# Altium PCB 项目-6层核心板.PcbDoc (part 3 of 3)
Units mil, origin at the board's own origin, x right, y up, seen from the top; angles counter-clockwise.
Board outline 2165.35 x 1574.8 mil, 6 copper layers (TOP, GND02, ART03, ART04, PWR05, BOTTOM); 172 components, 0 nets, 834 pads, 541 vias.
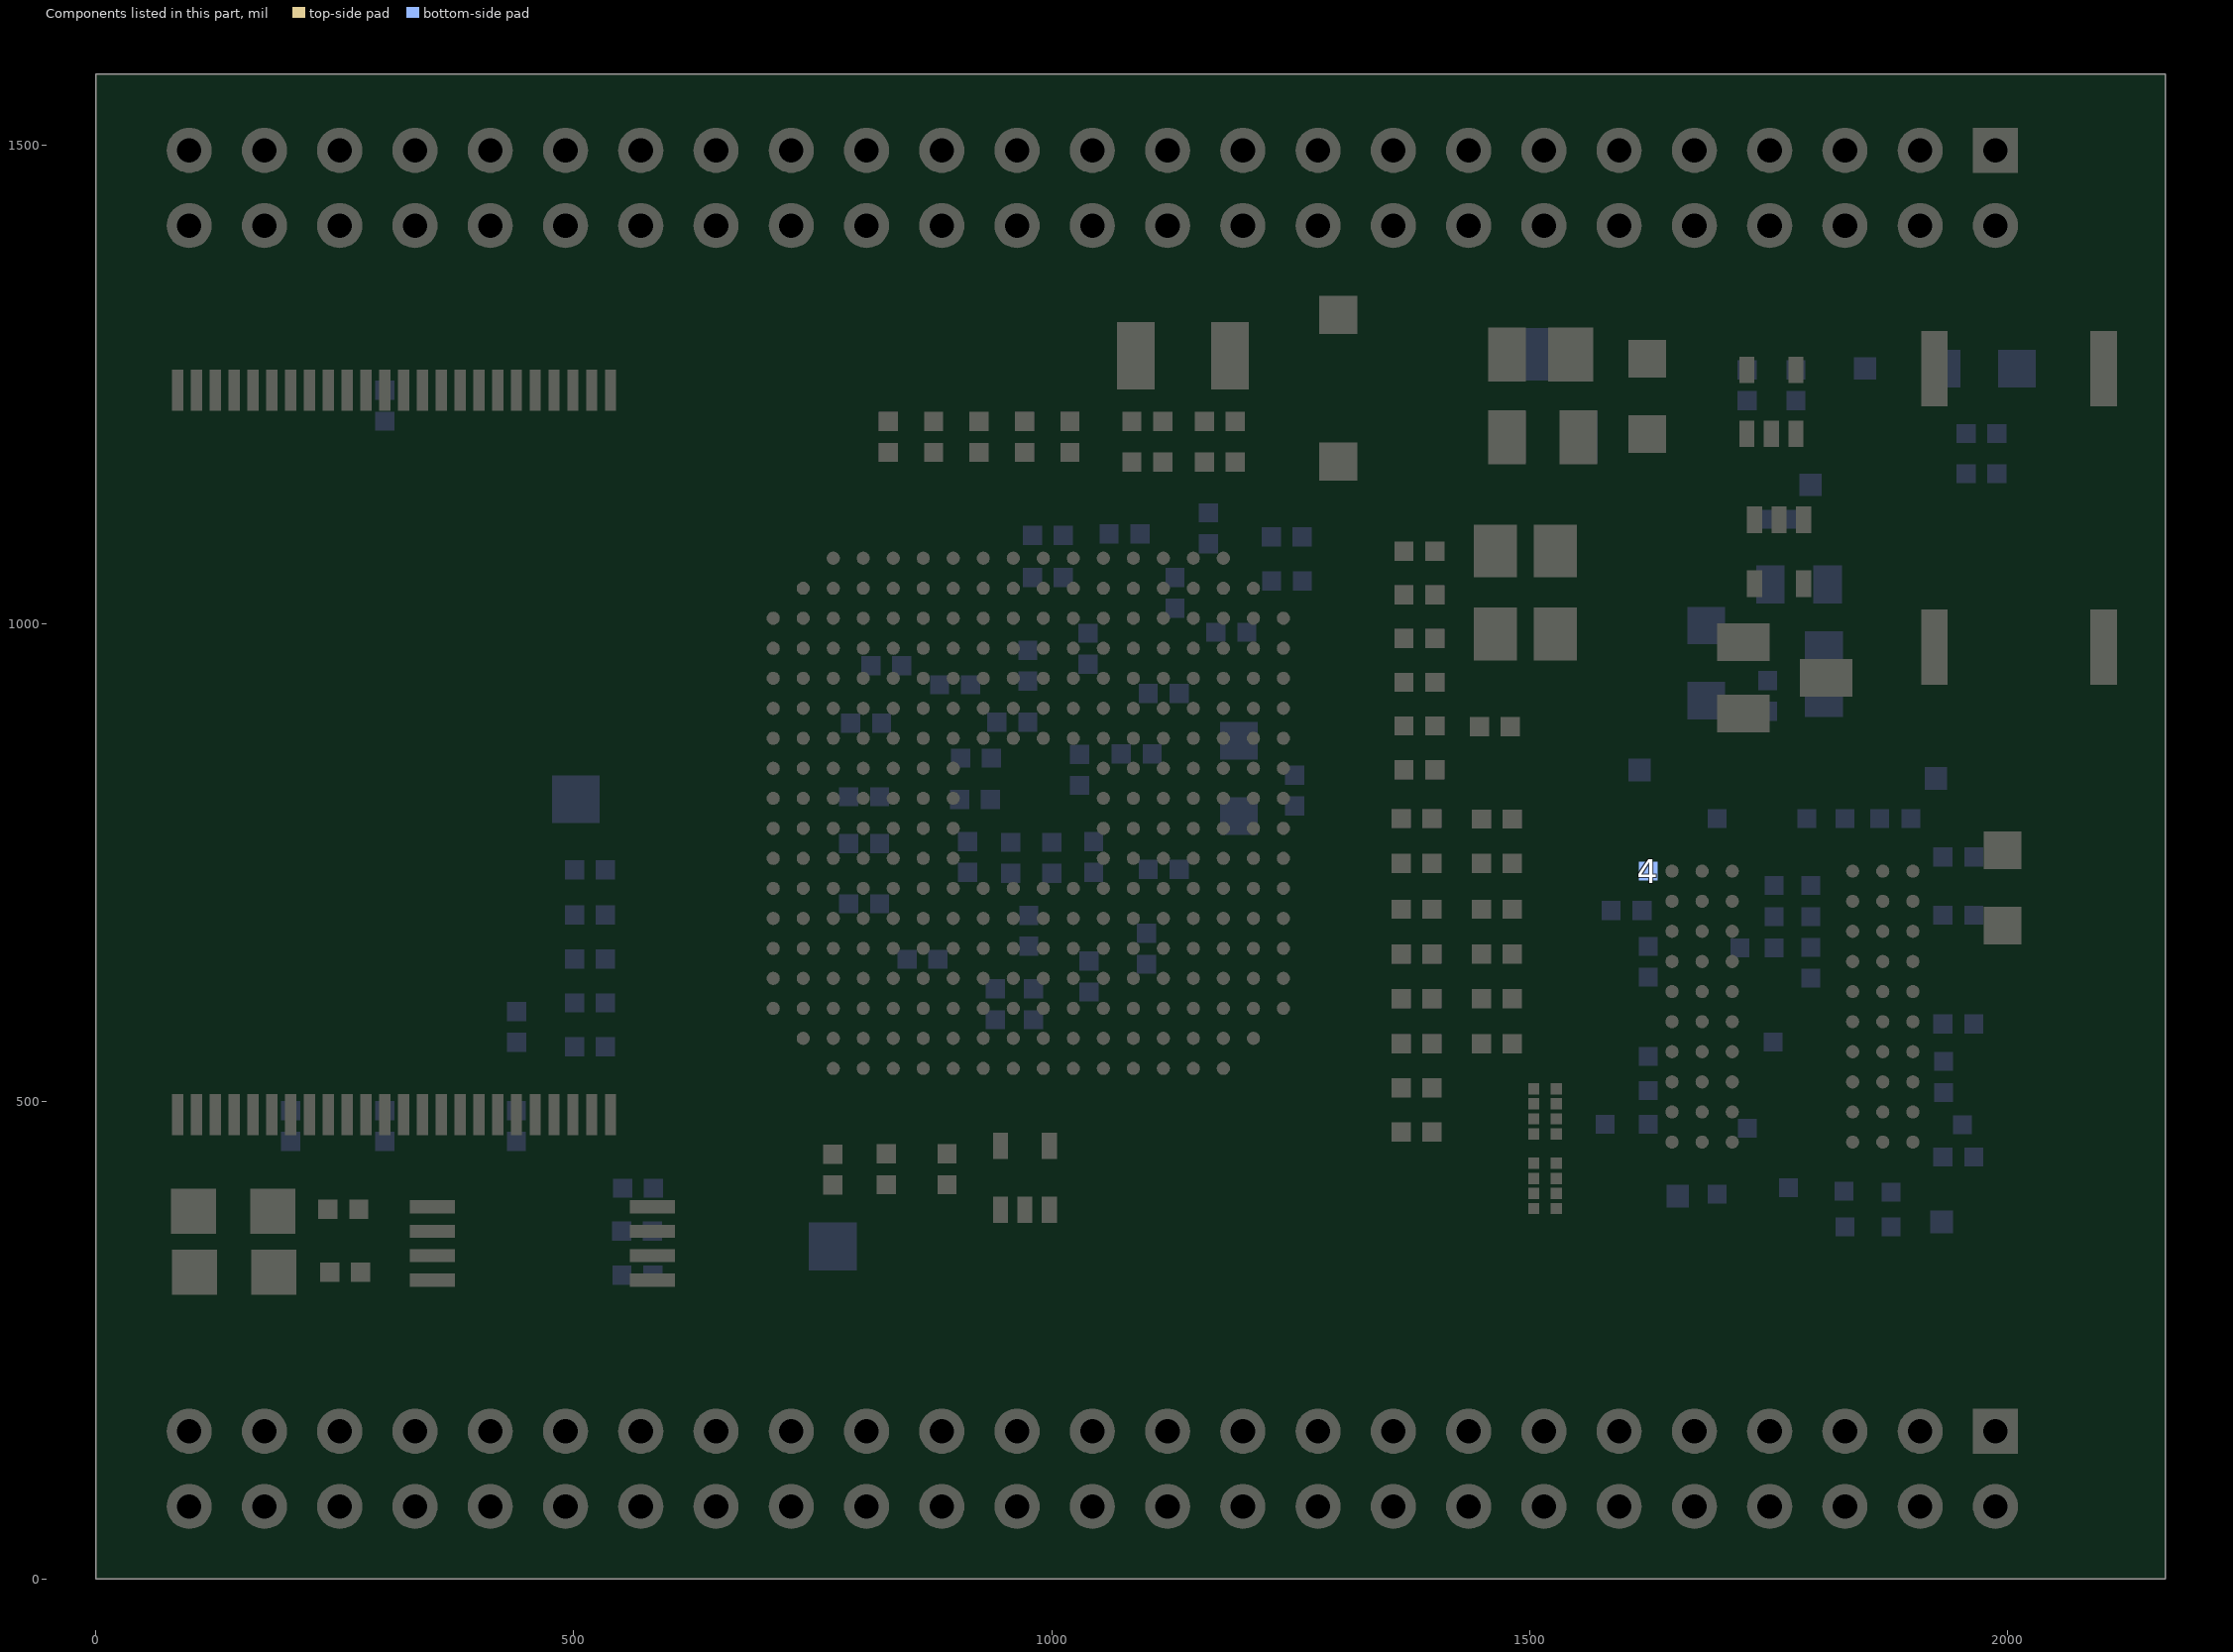
[diagram p7: the components of this part, seen from the top]

## Via types
v1: diameter 16, hole 8, TOP to BOTTOM, tented both sides, 541 vias

## Nets (pads, with @x,y where several pads share a name; then routed paths per layer and width w, separated by ;. In a path a pad name is that pad's centre, name@x,y a point inside that pad or via, vN(x,y) a via of type N, cw(c..) or ccw(c..) an arc to the next point about the centre after c; other vN are vias at no path point) (continued)
copper on no net: (continued)
  ART04 w6.2: 97.6,1416.26 97.01,1415.67 97.01,1367.73 111.01,1353.73 111.01,1164.73 165.01,1110.73 165.01,897.73 206.01,856.73 206.01,633.73 274.01,565.73 v1(385.01,565.73) 450.01,565.73 498.01,517.73 723.33,517.73 v1(724.3,518.7) ; 97.6,1495 141.01,1451.59 141.01,1356.73 ; v1(125.01,1073.73) 125.01,879.73 168.01,836.73 168.01,527.73 223.01,472.73 308.01,472.73 374.01,406.73 400.01,406.73 423.01,383.73 643.01,383.73 655.01,395.73 738.01,395.73 756.01,413.73 834.01,413.73 897,476.72 v1(897,503) ; v1(126.01,1120.73) 146.01,1100.73 146.01,888.73 187.01,847.73 187.01,630.73 270.01,547.73 444.01,547.73 492.01,499.73 739.01,499.73 775.01,535.73 804.13,535.73 v1(818.5,550.1) ; 141.01,1361.73 141.01,1356.73 ; 176.34,1416.26 178.01,1414.59 178.01,1338.73 142.01,1302.73 142.01,1173.73 201.01,1114.73 201.01,918.73 539.01,580.73 662.01,580.73 677.01,565.73 708.53,565.73 v1(724.3,581.5) ; 176.34,1495 215.01,1456.33 215.01,1346.73 162.01,1293.73 162.01,1178.73 177.01,1163.73 220.01,1163.73 241.01,1142.73 241.01,936.73 565.01,612.73 653.01,612.73 673.01,632.73 705.01,632.73 724.84,612.9 v1(787.1,612.9) ; v1(184.1,1204.87) 204.24,1184.73 244.01,1184.73 255.01,1173.73 255.01,1075.73 ; v1(203.69,555.14) 255.1,503.73 364.01,503.73 393.01,474.73 439.01,474.73 457.84,455.9 v1(691.9,455.9) v1@692.9,455.9 ; v1(203.78,525.14) 240.19,488.73 355.01,488.73 385.01,458.73 430.01,458.73 470.01,418.73 565.01,418.73 585.01,438.73 648.01,438.73 657.01,429.73 700.01,429.73 724.3,454.02 v1(724.3,455.9) ; v1@223.01,1118.73 223.01,928.73 554.54,597.2 859.54,597.2 865.6,591.14 865.6,565.8 v1(881.3,550.1) ; v1(223.47,1204.87) 249.87,1204.87 273.01,1181.73 273.01,963.73 560.01,676.73 654.01,676.73 670.74,660 890.74,660 900.01,650.73 908.01,650.73 912.7,646.04 v1(912.7,612.9) ; 255.01,1090.73 255.01,1075.73 ; 255.08,1416.26 257.01,1414.33 257.01,1366.73 ; 255.08,1495 292.01,1458.07 292.01,1387.73 274.01,1369.73 274.01,1261.73 386.86,1148.88 386.86,983.88 573.01,797.73 787.01,797.73 818.5,829.22 v1(818.5,864.1) ; 257.01,1373.73 257.01,1366.73 ; v1(285.01,589.73) 462.01,589.73 513.01,538.73 747.01,538.73 757.01,548.73 785.73,548.73 v1(818.5,581.5) ; v1(315.01,1084.87) 295.01,1064.87 295.01,972.73 576.34,691.4 922.34,691.4 928.4,685.34 928.4,597.2 v1(912.7,581.5) ; v1(316.01,1048.73) 316.01,976.73 569.94,722.8 683.94,722.8 703.01,703.73 802.01,703.73 821.08,722.8 950.94,722.8 959.8,713.94 959.8,597.2 v1(912.7,550.1) ; 333.82,1416.26 333.82,1375.92 357.01,1352.73 357.01,1210.73 404.71,1163.03 404.71,991.03 579.01,816.73 776.01,816.73 787.1,827.82 v1(787.1,864.1) ; 333.82,1495 374.01,1454.81 374.01,1217.73 422.56,1169.18 422.56,1000.18 577.01,845.73 705.93,845.73 v1(724.3,864.1) ; v1(350.32,1124.87) 350.32,988.42 584.54,754.2 935.54,754.2 972.01,717.73 972.01,583.73 928.4,540.12 v1(928.4,503) ; v1(365.01,525.73) 398.01,492.73 451.01,492.73 470.01,473.73 661.01,473.73 788.01,473.73 834.2,519.92 834.2,565.8 v1(849.9,581.5) ; v1(400.63,525.14) 419.04,506.73 461.01,506.73 481.01,486.73 689.01,486.73 755.13,486.73 v1(787.1,518.7) ; v1(411.01,426.73) 439.01,398.73 571.01,398.73 595.01,422.73 641.01,422.73 647.01,416.73 731.01,416.73 742.51,428.23 818.51,428.23 849.9,459.62 v1(849.9,550.1) ; 412.56,1495 458.26,1449.3 458.26,1160.73 ; 414.01,1421.73 414.01,1223.73 440.41,1197.33 440.41,1010.33 586.64,864.1 v1(661.5,864.1) ; 458.26,1288.73 458.26,1160.73 ; 491.3,1416.26 495.01,1412.55 495.01,1004.73 596.01,903.73 747.47,903.73 v1(755.7,895.5) ; 491.3,1495 531.01,1455.29 531.01,1025.99 v1(630.1,926.9) ; 570.04,1416.26 569.01,1415.23 569.01,1014.73 661.51,922.23 767.98,922.23 779.01,911.2 802.8,911.2 v1(818.5,926.9) ; 570.04,1495 609.01,1456.03 609.01,1388.73 592.01,1371.73 592.01,1011.73 664.51,939.23 774.77,939.23 v1(787.1,926.9) ; 647.01,1414.49 648.78,1416.26 648.78,1389.5 612.01,1352.73 612.01,1012.73 666.44,958.3 v1(724.3,958.3) ; 648.78,1495 686.01,1457.77 686.01,1386.73 630.01,1330.73 630.01,1015.73 674.01,971.73 706.33,971.73 v1(724.3,989.7) ; v1(692.9,864.1) 673.27,883.73 591.01,883.73 458.26,1016.48 458.26,1160.73 ; v1(692.9,989.7) 678.04,989.7 648.01,1019.73 648.01,1302.73 728.01,1382.73 728.01,1415.77 727.52,1416.26 ; v1(692.9,1021.1) 692.9,1262.62 806.26,1375.98 806.26,1416.26 809.73,1419.73 810.01,1419.73 ; v1(724.3,1115.3) 724.3,1239.02 858.01,1372.73 920.21,1372.73 963.74,1416.26 ; 727.52,1495 764.01,1458.51 764.01,1376.73 669.01,1281.73 669.01,1019.73 683.34,1005.4 740,1005.4 v1(755.7,989.7) ; v1(755.7,864.1) 776.02,884.42 810.7,884.42 837.48,911.2 956.48,911.2 966.01,920.73 966.01,1042.73 1008.01,1084.73 1088.14,1084.73 1123.14,1119.73 1260.01,1119.73 1297.01,1156.73 1297.01,1247.73 1317.01,1267.73 1317.01,1303.73 ; v1(755.7,1021.1) 708.01,1068.79 708.01,1251.73 842.01,1385.73 842.01,1459.25 806.26,1495 ; v1(755.7,1115.3) 740.01,1130.99 740.01,1225.73 869.01,1354.73 956.01,1354.73 1000.01,1398.73 1000.01,1458.73 963.74,1495 ; v1@755.7,1146.7 v1(755.7,1151) 755.7,1219.42 874.35,1338.07 964.29,1338.07 984.48,1358.26 1042.48,1416.26 ; v1@784.95,1148.85 772.01,1161.79 772.01,1207.73 886.88,1322.6 980.88,1322.6 1038.01,1379.73 1063.01,1379.73 1083.01,1399.73 1083.01,1449.73 1046.01,1486.73 ; v1(787.1,581.5) 769.33,563.73 742.01,563.73 732.01,553.73 664.01,553.73 652.51,565.23 522.51,565.23 444.01,643.73 v1(227.01,643.73) 227.01,866.73 182.01,911.73 182.01,1116.76 127.01,1171.76 127.01,1259.73 127.01,1313.73 141.01,1327.73 141.01,1356.73 ; v1(787.1,738.5) 765.33,716.73 708.01,716.73 686.24,738.5 575.24,738.5 336.01,977.73 336.01,1096.73 327.01,1105.73 307.01,1105.73 290.01,1122.73 290.01,1196.73 257.01,1229.73 257.01,1366.73 ; v1(787.1,1021.1) 787.1,1080.82 845.01,1138.73 845.01,1180.73 897.01,1232.73 897.01,1253.73 930.01,1286.73 986.01,1286.73 1045.01,1345.73 1076.01,1345.73 1108.89,1378.61 1145.89,1378.61 1159.01,1391.73 1159.01,1457.21 1121.22,1495 ; v1(787.1,1115.3) 809.01,1137.21 809.01,1189.73 852.01,1232.73 852.01,1248.73 872.52,1269.24 888.52,1269.24 922.09,1302.81 980.09,1302.81 1039.01,1361.73 1066.69,1361.73 1121.22,1416.26 ; v1(818.5,1021.1) 834.2,1036.8 834.2,1105.33 860.01,1131.14 860.01,1165.73 907.01,1212.73 939.01,1212.73 948.01,1221.73 948.01,1248.73 968.01,1268.73 990.01,1268.73 1051.01,1329.73 1089.01,1329.73 1125.01,1365.73 1185.01,1365.73 1199.96,1380.68 1199.96,1416.26 ; v1(849.9,801.3) 891.01,801.3 950.01,860.3 950.01,880.73 984.01,914.73 984.01,1039.73 1012.48,1068.2 1123.01,1068.2 1156.54,1101.73 1267.01,1101.73 1310.01,1144.73 1310.01,1238.73 1333.01,1261.73 1333.01,1310.73 ; v1(849.9,1021.1) 869.01,1040.21 869.01,1076.73 891.88,1099.6 961.88,1099.6 982.01,1119.73 1048.01,1119.73 1102.01,1173.73 1137.01,1173.73 1239.01,1173.73 1258.01,1192.73 1258.01,1262.73 1249.01,1271.73 1249.01,1353.73 1237.01,1365.73 1237.01,1453.73 1202.01,1488.73 ; v1(881.3,581.5) 897,597.2 897,621.74 890.14,628.6 732.14,628.6 715.01,645.73 661.01,645.73 642.01,626.73 583.01,626.73 255.01,954.73 255.01,1075.73 ; v1(881.3,989.7) 928.4,1036.8 928.4,1062.12 934.48,1068.2 971.48,1068.2 1006.01,1102.73 1083.01,1102.73 1139.01,1158.73 1258.01,1158.73 1274.01,1174.73 1274.01,1411.57 1278.7,1416.26 ; v1(1006.9,612.9) 1006.9,576.62 995.01,564.73 995.01,441.73 1120.01,316.73 1812.01,316.73 1916.73,421.45 v1(1916.73,473.07) ; v1(1038.3,581.5) 1038.3,594.44 1033.01,599.73 1029.01,599.73 1022.27,592.99 1022.27,565.47 1010.01,553.21 1010.01,446.73 1126.01,330.73 1806.01,330.73 1903.01,427.73 1903.01,450.73 1897.01,456.73 1859.01,456.73 1853.74,462 v1(1853.74,473.07) ; v1(1069.7,518.7) 1069.7,455.04 1153.01,371.73 1170.01,371.73 1174.56,371.73 1179.11,376.28 1179.11,383.18 1183.66,387.73 1192.76,387.73 1197.31,383.18 1197.31,376.28 1201.86,371.73 1210.96,371.73 1215.51,376.28 1215.51,383.18 1220.06,387.73 1229.16,387.73 1233.71,383.18 1233.71,376.28 1238.26,371.73 1247.36,371.73 1251.91,376.28 1251.91,383.18 1256.46,387.73 1265.56,387.73 1270.11,383.18 1270.11,376.28 1274.66,371.73 1283.76,371.73 1288.31,376.28 1288.31,383.18 1292.86,387.73 1301.96,387.73 1306.51,383.18 1306.51,376.28 1311.06,371.73 1320.16,371.73 1324.71,376.28 1324.71,383.18 1329.26,387.73 1338.36,387.73 1342.91,383.18 1342.91,376.28 1347.46,371.73 1356.56,371.73 1361.11,376.28 1361.11,383.18 1365.66,387.73 1374.76,387.73 1379.31,383.18 1379.31,376.28 1383.86,371.73 1392.96,371.73 1397.51,376.28 1397.51,383.18 1402.06,387.73 1411.16,387.73 1415.71,383.18 1415.71,376.28 1420.26,371.73 1427.01,371.73 1706.01,371.73 1791.6,457.32 1832.42,457.32 1838.01,451.73 1838.01,444.73 1834.85,441.57 v1(1822.24,441.57) ; v1(1069.7,550.1) 1056.67,537.07 1056.35,537.07 1042.01,522.73 1042.01,515.73 1053.01,504.73 1053.01,490.73 1043.01,480.73 1043.01,465.73 1053.01,455.73 1053.01,445.73 1140.01,358.73 1743.01,358.73 1748.01,363.73 1748.01,389.73 1782.01,423.73 1789.01,423.73 1793.01,419.73 1793.01,367.73 1798.01,362.73 1815.01,362.73 1824.01,371.73 1824.01,389.73 1816.01,397.73 1816.01,406.73 1822.01,412.73 1838.01,412.73 1844.01,406.73 1859.01,406.73 1869.01,416.73 1869.01,426.3 v1(1853.74,441.57) v1@1851.85,441.57 ; v1(1069.7,612.9) 1069.7,614.04 1043.01,640.73 1031.01,640.73 1026.01,635.73 1026.01,618.73 1029.01,615.73 1043.01,615.73 1054.01,604.73 1054.01,568.73 1026.01,540.73 1026.01,451.73 1134.01,343.73 1759.01,343.73 1771.01,355.73 v1(1771.01,386.73) v1@1771.01,389.73 ; v1(1069.7,989.7) 1085.4,1005.4 1353.01,1005.4 1382.34,1034.73 1558.01,1034.73 1575.01,1051.73 1624.01,1051.73 1646.29,1074.01 v1(1735,1074.01) ; v1(1069.7,1021.1) 1085.4,1036.8 1234.08,1036.8 1348.55,1151.27 1348.55,1310.27 1394.01,1355.73 1394.01,1458.43 1357.44,1495 ; v1(1101.1,518.7) 1101.1,477.64 1159.81,418.93 1500.81,418.93 1507.01,412.73 1507.01,406.73 1513.01,400.73 1525.01,400.73 1532.01,407.73 1532.01,429.73 1527.01,434.73 1513.01,434.73 1505.01,442.73 1505.01,452.73 1509.6,457.32 1527.01,457.32 1531.56,457.32 1536.11,461.87 1536.11,472.29 1540.66,476.84 1549.76,476.84 1554.31,472.29 1554.31,461.87 1558.86,457.32 1567.96,457.32 1572.51,461.87 1572.51,472.29 1577.06,476.84 1586.16,476.84 1590.71,472.29 1590.71,461.87 1595.26,457.32 1604.36,457.32 1608.91,461.87 1608.91,472.29 1613.46,476.84 1622.56,476.84 1627.11,472.29 1627.11,461.87 1631.66,457.32 1660.01,457.32 1712.01,457.32 v1(1727.76,441.57) ; v1(1101.1,581.5) 1085.4,565.8 1085.4,465.34 1147.01,403.73 1424.01,403.73 1441.01,386.73 1593.56,386.73 1598.11,391.28 1598.11,424.18 1602.66,428.73 1611.76,428.73 1616.31,424.18 1616.31,391.28 1620.86,386.73 1629.96,386.73 1634.51,391.28 1634.51,424.18 1639.06,428.73 1648.16,428.73 1652.71,424.18 1652.71,391.28 1657.26,386.73 1667.71,386.73 1672.26,391.28 1672.26,424.18 1676.81,428.73 1685.91,428.73 1690.46,424.18 1690.46,391.28 ; v1(1132.5,518.7) 1132.5,490.24 1141.51,481.23 1160.51,481.23 1167.51,474.23 1167.51,455.23 1174.01,448.73 1186.56,448.73 1191.11,453.28 1191.11,482.18 1195.66,486.73 1204.76,486.73 1209.31,482.18 1209.31,453.28 1213.86,448.73 1222.96,448.73 1227.51,453.28 1227.51,482.18 1232.06,486.73 1241.16,486.73 1245.71,482.18 1245.71,453.28 1250.26,448.73 1259.36,448.73 1263.91,453.28 1263.91,482.18 1268.46,486.73 1277.56,486.73 1282.11,482.18 1282.11,453.28 1286.66,448.73 1295.76,448.73 1300.31,453.28 1300.31,482.18 1304.86,486.73 1313.96,486.73 1318.51,482.18 1318.51,453.28 1323.06,448.73 1332.16,448.73 1336.71,453.28 1336.71,482.18 1341.26,486.73 1350.36,486.73 1354.91,482.18 1354.91,453.28 1359.46,448.73 1368.71,448.73 1373.26,453.28 1373.26,482.18 1377.81,486.73 1386.91,486.73 1391.46,482.18 1391.46,453.28 1396.01,448.73 1406.01,448.73 1410.01,452.73 1410.01,486.73 1421.01,497.73 1496.01,497.73 1508.01,509.73 1541.01,509.73 1552.01,520.73 1564.01,520.73 1573.01,511.73 1590.01,511.73 1599.01,520.73 1616.01,520.73 1625.01,511.73 1641.01,511.73 1649.6,520.32 1673.42,520.32 1679.01,514.73 1679.01,506.73 1676.85,504.57 v1(1664.76,504.57) ; v1(1132.5,550.1) 1132.5,562.22 1136.01,565.73 1144.01,565.73 1148.2,561.54 1148.2,511.54 1157.01,502.73 1312.01,502.73 1344.01,534.73 1392.01,534.73 1409.01,551.73 1428.01,551.73 1441.01,564.73 1460.01,564.73 1473.01,551.73 1775.01,551.73 1786.01,540.73 1802.01,540.73 1813.01,551.73 1833.01,551.73 1838.01,546.73 1838.01,526.73 1831.6,520.32 1768.6,520.32 1764.01,515.73 1764.01,493.73 1768.92,488.82 1832.92,488.82 1837.99,483.75 1837.99,476.71 1834.35,473.07 v1(1822.24,473.07) ; v1(1132.5,612.9) 1116.8,597.2 1116.8,482.94 1165.01,434.73 1419.01,434.73 1437.01,452.73 1468.73,452.73 v1(1484.01,468.01) ; v1(1163.9,518.7) 1304.98,518.7 1336.01,549.73 1383.01,549.73 1398.7,565.42 1410.7,565.42 1424.01,578.73 1534.01,578.73 1547.01,591.73 1581.27,591.73 1591,582 1626.28,582 1641.01,596.73 1695.01,596.73 1725.01,566.73 1818.01,566.73 1841.01,589.73 1855.01,589.73 1863.01,581.73 1875.01,581.73 1883.01,589.73 1911.16,589.73 1915.71,585.18 1915.71,542.28 1920.26,537.73 1929.36,537.73 1933.91,542.28 1933.91,585.18 1938.46,589.73 1954.01,589.73 1960.01,583.73 1960.01,511.73 1954.01,505.73 1912.6,505.73 1898.01,520.32 1869.49,520.32 v1(1853.74,504.57) ; v1(1163.9,550.1) 1180.27,533.73 1295.01,533.73 1325.39,564.11 1368.39,564.11 1380.01,575.73 1380.01,591.73 1388.02,599.74 1499,599.74 1506.01,592.73 1524.73,592.73 1540.73,608.73 1585.27,608.73 1598,596 1617.28,596 1633.01,611.73 1706.27,611.73 1737.27,580.73 1812.01,580.73 1838.01,606.73 1966.01,606.73 1977.01,595.73 1977.01,556.18 1981.56,551.63 1992.46,551.63 1997.01,547.08 1997.01,537.98 1992.46,533.43 1981.56,533.43 1977.01,528.88 1977.01,503.73 ; v1(1195.3,707.1) 1179.6,691.4 1123.34,691.4 1116.8,697.94 1116.8,715.52 1124.08,722.8 1257.08,722.8 1275.01,740.73 1275.01,754.73 1287.01,766.73 1627.01,766.73 1653.01,740.73 1704.01,740.73 1712.01,732.73 1712.01,709.3 v1(1696.26,693.54) ; v1(1195.3,738.5) 1195.3,767.3 1229.73,801.73 1299.01,801.73 1317.01,819.73 1365.01,819.73 1383.01,801.73 1706.16,801.73 1710.71,797.18 1710.71,780.28 1715.26,775.73 1724.36,775.73 1728.91,780.28 1728.91,797.18 1733.46,801.73 1805.01,801.73 1815.01,791.73 1815.01,779.73 1810.01,774.73 1755.01,774.73 1747.01,766.73 1747.01,744.29 v1(1727.76,725.03) ; v1(1226.71,675.7) 1206.88,655.88 1193.56,655.88 1189.01,651.33 1189.01,642.23 1193.56,637.68 1206.46,637.68 1211.01,633.13 1211.01,597 1216.01,592 1230,592 1235,587 1235,581 1228,574 1216.01,574 1211.01,569 1211.01,561.99 1219,554 1259.83,554 1289.11,583.28 1289.11,622.18 1293.66,626.73 1302.76,626.73 1307.31,622.18 1307.31,583.28 1311.86,578.73 1320.96,578.73 1325.51,583.28 1325.51,622.18 1330.06,626.73 1339.16,626.73 1343.71,622.18 1343.71,583.28 1348.26,578.73 1358.01,578.73 1365.01,585.73 1365.01,602 1376.48,613.47 1449.92,613.47 1467,630.55 v1(1664.76,630.55) ; v1(1226.71,707.1) 1242.41,691.4 1271.4,691.4 1305,725 1350.74,725 1370.01,705.73 1385.01,705.73 1398.01,718.73 1436.01,718.73 1447.01,707.73 1465.01,707.73 1476.01,718.73 1527.01,718.73 1537.01,708.73 1537.01,685.73 1546.01,676.73 1798.01,676.73 1805.01,683.73 1805.01,689.73 1799.01,695.73 1782.01,695.73 1776.01,701.73 1776.01,709.73 1782.01,715.73 1800.01,715.73 1805.01,720.73 1805.01,729.73 1796.01,738.73 1768.01,738.73 1755.01,725.73 1755.01,700.73 1747.82,693.54 v1(1727.76,693.54) ; v1(1226.71,738.5) 1272.93,784.73 1668.06,784.73 v1(1696.26,756.53) ; v1(1258.1,675.7) 1283.7,675.7 1319,711 1342,711 1358.27,694.73 1383,694.73 1392.73,685 1442.74,685 1465.7,662.04 1474.56,662.04 1479.11,666.59 1479.11,695.49 1483.66,700.04 1492.76,700.04 1497.31,695.49 1497.31,666.59 1501.86,662.04 1791.96,662.04 1822,632 1822,613 1816.79,607.79 1807.21,607.79 1802,613 1802,621 1796,627 1787,627 1782,622 1782,605 1774.73,597.73 1767,597.73 1759.26,605.47 v1(1759.26,630.54) ; v1(1258.1,707.1) 1263.03,707.1 1306.66,750.73 1352.16,750.73 1356.71,746.18 1356.71,737.28 1361.26,732.73 1370.36,732.73 1374.91,737.28 1374.91,746.18 1379.46,750.73 1388.56,750.73 1393.11,746.18 1393.11,737.28 1397.66,732.73 1443.16,732.73 1447.71,737.28 1447.71,746.18 1452.26,750.73 1461.36,750.73 1465.91,746.18 1465.91,737.28 1470.46,732.73 1479.56,732.73 1484.11,737.28 1484.11,746.18 1488.66,750.73 1497.76,750.73 1502.31,746.18 1502.31,737.28 1506.86,732.73 1530.01,732.73 1535.01,737.73 1535.01,746.73 1539.01,750.73 1549.01,750.73 1552.01,747.73 1552.01,697.73 1558.01,691.73 1568.56,691.73 1573.11,696.28 1573.11,743.18 1577.66,747.73 1586.76,747.73 1591.31,743.18 1591.31,696.28 1595.86,691.73 1604.96,691.73 1609.51,696.28 1609.51,743.18 1614.06,747.73 1623.16,747.73 1627.71,743.18 1627.71,696.28 1632.26,691.73 1641.01,691.73 1645.01,695.73 1645.01,702.73 1651.57,709.29 1680.51,709.29 v1(1696.26,725.03) ; v1@1260.09,646.3 v1(1258.1,644.3) 1258.1,631.82 1255.01,628.73 1247.01,628.73 1243.01,632.73 1243.01,655.73 1247.01,659.73 1271.01,659.73 1289.01,641.73 1300.01,641.73 1309.01,650.73 1321.01,650.73 1330.01,641.73 1352.55,641.73 1357.1,646.28 1357.1,669.18 1361.65,673.73 1370.75,673.73 1375.3,669.18 1375.3,646.28 1379.85,641.73 1394.01,641.73 1398.58,646.3 1712.01,646.3 v1(1727.76,630.54) ; 1278.7,1495 1317.01,1456.69 1317.01,1303.73 ; 1317.01,1308.73 1317.01,1303.73 ; 1333.01,1315.73 1333.01,1310.73 ; 1357.44,1416.26 1357.44,1362.16 1333.01,1337.73 1333.01,1310.73 ; v1(1427.39,514.01) 1417.29,514.01 1405.01,501.73 1350.01,501.73 1346.01,505.73 1346.01,514.73 1352.01,520.73 1398.01,520.73 1413.34,536.06 1441.16,536.06 1445.71,531.51 1445.71,518.61 1450.26,514.06 1459.36,514.06 1463.91,518.61 1463.91,531.51 1468.46,536.06 1495.68,536.06 1506.01,525.73 1528.01,525.73 1538.34,536.06 v1(1664.76,536.06) ; 1436.18,1416.26 1477,1375.44 1477,1311.73 v1(1552,1236.73) ; v1(1449.01,822.73) v1(1566.01,822.73) ; v1(1576.29,567.56) 1638.01,567.56 1654.18,583.73 1680.09,583.73 v1(1696.26,567.56) v1@1696.26,571.48 ; 1692.06,389.68 1690.46,391.28 ; v1(1696.26,473.07) 1761.67,473.07 1769.01,465.73 1769.01,456.73 1736.37,424.09 1721.37,424.09 1711.01,413.73 1711.01,398.73 1700.01,387.73 1694.01,387.73 1690.46,391.28 ; v1(1885.23,504.57) 1897.07,492.73 1930.16,492.73 1934.71,488.18 1934.71,475.28 1939.26,470.73 1948.36,470.73 1952.91,475.28 1952.91,488.18 1957.46,492.73 1968.01,492.73 1977.01,501.73
  ART04 w10: 972,532.73 972,558.83 ; v1(1430,847) 1572.74,847 1582.01,837.73 v1@1790.01,837.73
  ART04 w15: v1(1101.1,895.5) 1101.1,878.64 1110.01,869.73 1582.01,869.73 1591.01,860.73 1677.74,860.73 1690.01,873 v1(1742.01,873) v1(1803.01,873) ; v1(1132.5,895.5) 1256.01,895.5 1277.24,916.73 1417.01,916.73 1428.01,905.73 1483,905.73 1496,918.73 1570.01,918.73 v1(1602.01,886.73) v1(1628.01,886.73) v1(1651.01,886.73)
  BOTTOM w5: 771.01,723.31 771.01,754.2 ; v1(1195.3,612.9) 1195.3,627.3 1200,632 1200,636 1196,640 1186,640 1183,643 1183,654 1189,660 1268,660 1280.5,672.5 1321.5,672.5 v1(1330,664) ; v1(1226.98,770.18) 1211.01,754.21 1211.01,698.39 1218,691.4 1268.6,691.4 1275.5,684.5 1321.5,684.5 v1(1330,693) ; v1(1423,669) 1432,678 1446.97,678 1459,690.03 1459,722.03 1461.97,725 1481.03,725 1490,716.03 1490,629.24 1486.26,625.5 1458.76,625.5 1448,614.74 1448,580.26 1458.76,569.5 1472.26,569.5 1476,565.76 1476,556.24 1472.26,552.5 1458.76,552.5 1448,541.74 1448,503.03 1467.03,484 1511.97,484 1528,500.03 1528,577.03 1537.97,587 1553.74,587 1564.5,597.76 1564.5,655.26 1568.24,659 1577.76,659 1581.5,655.26 1581.5,597.76 1592.26,587 1705,587 1715,577 1715,554.8 v1(1696.26,536.06) ; v1(1423,700.91) 1433.91,690 1442,690 1447,695 1447,727 1457,737 1486,737 1502,721 1502,624.26 1491.24,613.5 1463.74,613.5 1460,609.76 1460,585.24 1463.74,581.5 1477.24,581.5 1488,570.74 1488,551.26 1477.24,540.5 1463.74,540.5 1460,536.76 1460,508 1472,496 1507,496 1516,505 1516,582 1533,599 1548.76,599 1552.5,602.74 1552.5,660.24 1563.26,671 1582.74,671 1593.5,660.24 1593.5,602.74 1597.24,599 1709.97,599 1727.76,581.21 v1(1727.76,536.06)
  BOTTOM w5.7: 203.73,490.14 203.73,525.09 v1(203.78,525.14) ; v1(385.01,565.73) 413.15,593.87 440.01,593.87 ; 439.95,490.14 v1(440,525.14) v1(440,525.14) 440,561.58 ; 500.72,742 500.72,814.72 502,816 ; 533,557 557.5,581.5 v1(692.9,581.5) ; 533,603 538.8,597.2 802.8,597.2 v1(818.5,612.9) v1@818.5,615.11 ; 533,649 537.7,644.3 v1(630.1,644.3) ; 533,695 552.74,695 571.01,676.73 636.28,676.73 653.01,660 708.6,660 v1(724.3,675.7) ; 533,742 583.6,691.4 740,691.4 v1(755.7,675.7) ; 582.59,318 582.31,318.28 582.31,364 625.82,364 v1(626,364.18) ; v1(755.7,581.5) 803.12,534.08 v1(803.12,444.6) ; 771,348 v1(771,385.74) ; v1(827.01,476.73) 827.01,529.54 834.2,536.73 834.2,597.2 v1(849.9,612.9) ; 829,1179 v1(829,1151) 865.6,1114.4 865.6,1101.73 896.81,1070.52 896.81,973.81 v1(881.3,958.3) ; v1(876.5,1151) 888.3,1151 v1(924,1115.3) ; v1(924,1154) 941.01,1136.99 941.01,1104.73 928.4,1092.12 928.4,1005.4 v1(944.1,989.7) ; v1@971.5,1151 v1(971.5,1154) 971.5,1179 ; 975,1043.14 979.86,1048 ; v1@1019,1151 v1(1019,1154) 1019,1179 ; v1(1101.1,958.3) 1116.8,974 1116.8,1003.66 1129,1015.86 ; v1(1132.5,675.7) 1132.5,642.22 1116.8,626.52 1116.8,502 1130,488.8 1130,413 1167,376 1428.71,376 v1(1456.01,403.3) ; v1(1163.9,612.9) 1179.6,597.2 1187.8,597.2 1195,590 1195,579 1179.6,563.6 1179.6,462.4 1207.21,434.79 1220,434.79 1238.43,434.79 1242.85,430.36 1242.85,417.76 1247.28,413.34 1256.12,413.34 1260.55,417.76 1260.55,430.36 1264.97,434.79 1273.82,434.79 1278.25,430.36 1278.25,417.76 1282.68,413.34 1291.53,413.34 1295.95,417.76 1295.95,430.36 1300.38,434.79 1309.22,434.79 1313.65,430.36 1313.65,417.76 1318.07,413.34 1326.93,413.34 1331.35,417.76 1331.35,430.36 1335.78,434.79 1344.62,434.79 1349.05,430.36 1349.05,417.76 1353.47,413.34 1362.32,413.34 1366.75,417.76 1366.75,430.36 1371.18,434.79 1380.03,434.79 1384.45,430.36 1384.45,417.76 1388.88,413.34 1397.72,413.34 1402.15,417.76 1402.15,430.36 1406.57,434.79 1411,434.79 v1(1456.01,434.79) ; v1(1163.9,644.3) 1148.01,628.41 1148.01,423.99 1175,397 1186,397 1190.43,397 1194.85,401.43 1194.85,408.2 1199.28,412.63 1208.12,412.63 1212.55,408.2 1212.55,401.43 1216.97,397 1223,397 1423.27,397 1445,418.73 1468.58,418.73 v1(1484.01,403.3) ; v1(1163.9,926.9) 1179.8,911 1242,911 1292,861 1354.5,861 1368.5,847 ; v1(1163.9,958.3) 1179.6,942.6 1253.4,942.6 1303,893 v1(1339,893) ; v1(1195.3,550.1) 1195.3,467.7 1212.27,450.73 1362,450.73 1366.43,450.73 1370.85,455.16 1370.85,507.34 1375.28,511.77 1384.12,511.77 1388.55,507.34 1388.55,455.16 1392.97,450.73 1401.82,450.73 1406.25,455.16 1406.25,495.44 1410.68,499.87 1419.53,499.87 1423.95,495.44 1423.95,455.16 1428.38,450.73 1457,450.73 1468.07,450.73 v1(1484.01,434.79) ; v1(1195.3,926.9) 1246,926.9 1297.9,875 1350.78,875 1368.5,892.72 ; v1(1226.71,958.3) 1266.14,958.3 1304.45,920 1350.05,920 1368.5,938.45 ; v1(1226.71,1021.1) 1243.8,1004 1348.67,1004 1368.5,984.17 ; v1(1258.1,1021.1) 1277.1,1021.1 1303,1047 1351.4,1047 1368.5,1029.9 ; 1317.73,582.46 1324.43,582.46 ; v1(1341.41,801.13) 1360.26,801.13 1365.56,795.83 ; 1365.56,607.2 1365.56,587.28 1360.74,582.46 1350.97,582.46 1346.55,586.89 1346.55,606.03 1342.12,610.46 1333.28,610.46 1328.85,606.03 1328.85,586.89 1324.43,582.46 ; 1365.56,654.06 1340.1,628.6 1217.61,628.6 1211.01,622 1211.01,591.57 1215.43,587.15 1238.32,587.15 1242.75,582.72 1242.75,573.88 1238.32,569.45 1215.43,569.45 1211.01,565.03 1211.01,556.18 1215.43,551.75 1246.59,551.75 1251.01,547.32 1251.01,538.47 1246.59,534.05 1215.43,534.05 1211.01,529.62 1211.01,520.78 1215.43,516.35 1246.59,516.35 1251.01,511.93 1251.01,503.07 1246.59,498.65 1215.43,498.65 1211.01,494.22 1211.01,480.99 1223,469 1273,469 1277.43,469 1281.85,473.43 1281.85,500.4 1286.28,504.82 1295.12,504.82 1299.55,500.4 1299.55,473.43 1303.97,469 1341,469 1347,475 1347,525 1334,538 1293,538 1271,560 1271,571 1281.73,581.73 1288.43,581.73 1292.85,586.16 1292.85,605.3 1297.28,609.73 1306.12,609.73 1310.55,605.3 1310.55,586.16 1314.24,582.46 1324.43,582.46 ; 1397.84,560.34 v1(1397.84,583.73) 1397.84,607.2 ; 1397.84,654.06 1397.84,653.28 v1(1420.88,630.24) ; v1(1424.01,748.97) 1397.84,775.14 1397.84,795.83 1398.44,795.23 1449.56,795.23 ; v1@1513,1328 v1(1514,1328) 1514,1281.69 1565.04,1281.69 1684,1162.73 v1(1728.01,1162.73) ; v1(1548.29,403.3) 1563.92,418.93 1585.81,418.93 1593.01,411.73 1593.01,377.73 1627.01,343.73 1726.01,343.73 1748.82,366.54 1779.82,366.54 1791.01,377.73 1791.01,497.73 1813.6,520.32 1838,520.32 v1(1853.74,536.06) ; v1(1548.29,434.79) 1566.23,452.73 1598.01,452.73 1626.01,424.73 1626.01,387.73 1642.01,371.73 1711.01,371.73 1719.01,379.73 1719.01,408.73 1751.01,440.73 1751.01,508.01 1794.73,551.73 1869.56,551.73 v1(1885.23,536.06) ; v1@1551.01,1234.73 1551.4,1234.73 1551.4,1195.08 ; v1(1576.29,403.3) 1576.29,373.45 1620.01,329.73 1734.01,329.73 1755.01,350.73 1789.01,350.73 1804.01,365.73 1804.01,486.34 v1(1822.24,504.57) ; v1(1576.29,434.79) 1593.95,434.79 1610.01,418.73 1610.01,381.73 1634.01,357.73 1717.01,357.73 1734.01,374.73 1734.01,404.73 1771.01,441.73 1771.01,506.73 1800.34,536.06 v1(1822.24,536.06) ; 1579.01,475.73 1591.27,475.73 1609.68,457.32 1680.51,457.32 v1(1696.26,473.07) ; 1624.01,475.73 1626.67,473.07 v1(1664.76,473.07) v1@1662.1,475.73 ; 1624.01,511.23 1630.67,504.57 v1(1664.76,504.57) ; 1624.01,546.73 1650.03,520.71 1680.12,520.71 v1(1696.26,504.57) ; 1624.01,662.04 1664.76,662.04 v1(1696.26,693.54) ; 1624.01,740.73 1680.56,740.73 v1(1696.26,725.03) ; 1624.83,630.55 1624.01,629.73 1663.94,629.73 v1(1664.76,630.55) ; 1685,919 1696,908 ; 1685,997.74 1685,1031 1698,1044 1748.91,1044 1751.9,1041.01 1751.9,943.18 1749,940.28 ; 1696.01,402.73 1696.01,441.32 v1(1696.26,441.57) ; 1696.01,795.73 1696.01,756.78 v1(1696.26,756.53) ; 1720.01,660.73 1727.76,652.98 v1(1727.76,630.54) ; v1(1727.76,441.57) 1728.01,441.82 1728.01,471.73 ; v1(1727.76,504.57) 1755.01,531.82 1755.01,549 1755.01,561.73 ; v1(1727.76,693.54) 1755.86,693.54 1756.01,693.4 ; v1(1727.76,725.03) 1728.45,725.73 1756.01,725.73 ; v1(1735,1074.01) 1735,1099 1745,1109 ; 1756.01,660.73 1759.26,657.48 v1(1759.26,630.54) ; v1(1771.01,386.73) 1771.01,409.73 ; 1778.59,1265.46 1778.59,1298.59 v1(1779,1299) ; v1(1790.74,756.53) 1790.01,757.27 1790.01,795.73 1790.74,795 ; 1794.01,628.73 1820.43,628.73 v1(1853.74,662.04) ; 1794.01,693.4 1822.1,693.4 v1(1822.24,693.54) ; 1794.99,662.04 1794.01,661.06 1821.26,661.06 v1(1822.24,662.04) ; 1796.57,725.73 1794.01,725.73 1810.06,709.68 1828.6,709.68 1828.92,710 1837.29,710 v1(1853.74,693.54) ; 1799,908 1808,917 ; v1(1822.24,441.57) 1822.24,412.5 1829.01,405.73 ; v1(1822.24,473.07) 1838,457.31 1838,432 1851,419 1851,389.72 1830.01,368.73 ; v1(1822.24,725.03) 1837.59,740.38 1837.59,762.89 1830.01,770.47 1830.01,795.73 ; v1(1853.74,441.57) 1878.01,417.3 1878.01,404.73 ; v1(1853.74,473.07) 1901,425.81 1901,391.72 1878.01,368.73 1879.01,368.73 ; v1(1853.74,504.57) 1869.49,520.32 1900.98,520.32 1922.39,541.73 1933.01,541.73 ; v1(1853.74,725.03) 1853.74,781.74 1866.01,794.01 1866.01,795.73 ; v1(1885.23,504.57) 1928.35,504.57 1933.01,509.23 ; v1(1885.24,725.04) 1868,742.28 1868,764.72 1899.01,795.73 ; v1(1916.73,473.07) 1918.94,475.28 1952.91,475.28 1950.7,473.07
  BOTTOM w6: 787.72,818.6 771.4,834.92 771.4,877.28 789.72,895.6 ; 1042.58,1076.3 1054,1064.88 1054,1013.74 1062.34,1005.4 1085.4,1005.4 ; 1060.01,1093.73 1085.4,1068.34 1085.4,1005.4 ; v1(1101.1,989.7) 1085.4,1005.4
  BOTTOM w8: v1(1006.9,644.3) 1036.88,614.32
  BOTTOM w10: 203.73,457.86 203.73,426.41 v1(204,426.14) ; v1(285,524.14) 302.16,506.98 302.16,490.14 ; v1@302,1180 302.16,1180.16 302.16,1211.66 ; 302.16,457.86 302.16,426.41 v1(302.43,426.14) ; 302.16,1243.94 302.16,1284.16 v1(303,1285) ; v1(380.01,675.73) 381.01,675.73 400.28,695 500.72,695 500.72,649 500.72,603 500.72,557 ; v1@385,426.41 v1(385.27,426.14) 385.27,441.99 403.01,459.73 438.08,459.73 439.95,457.86 ; v1(515,364) 550.03,364 ; v1(515.28,318) 550.31,318 ; 551.03,409 v1(551.03,438.97) ; 583.31,409 619,409 v1(626,402) ; 771.01,723.31 787.72,706.6 ; 771.01,754.2 772.32,754.2 787.72,769.6 787.72,818.6 787.72,826.44 807.01,845.73 831.53,845.73 v1(849.9,864.1) v1@849.9,859.62 ; 820,706.6 849.4,706.6 v1(849.9,707.1) ; 820,818.6 820,769.6 849.6,769.6 v1(849.9,769.9) 895.6,815.6 903.72,815.6 ; 829,1211.28 v1(829,1241) ; 936.97,859 936.97,816.57 936,815.6 961.2,815.6 v1(975.5,801.3) ; v1(944.1,644.3) 944.1,620.7 941,617.6 981,617.6 ; 971.5,1211.28 1019,1211.28 v1(1019,1241) ; 976,694.6 988.5,707.1 v1(1006.9,707.1) 1006.9,731.7 1000,738.6 ; 1029,862.88 1029,886.2 v1(1038.3,895.5) ; 1044,739.6 1044,732.8 v1(1069.7,707.1) ; v1(1069.7,738.5) 1096.9,738.5 1101,742.6 1101.1,742.7 v1(1101.1,769.9) 1101,770 1101,805.6 1101,832.6 v1(1101.1,832.7) ; 1092.29,1093.73 1095.02,1091 v1(1117,1091) ; v1(1163.9,1021.1) 1163.9,998.69 1171.86,990.73 ; 1164,1115.74 1164,1130 v1(1174,1140) ; 1262.28,1044.6 1262,1044.88 1262,1090.6 1324.02,1090.6 v1(1339,1075.62) ; v1(1297.01,560.79) 1297.07,560.73 1365.17,560.73 1365.56,560.34 ; 1400.78,938.45 1400.78,892.72 1400.78,847 v1(1430,847) ; 1400.78,984.17 1400.78,1029.9 v1(1422.89,1052) v1@1423,1052 ; v1@1517.82,748.97 v1(1518.01,748.79) ; 1655.01,400.73 1655.01,431.82 v1(1664.76,441.57) ; v1@1695,1233 v1(1695.18,1233.18) 1727.41,1233.18 ; 1727.41,1265.46 v1(1727.41,1298.41) ; 1778.59,1233.18 v1(1811.82,1233.18) v1@1812,1233 ; 1811.9,1041.01 v1(1855.99,1041.01)
  BOTTOM w12: 975.01,971.87 993.33,971.87 v1(1006.9,958.3) ; 975,971.88 975,990.2 975,1043.14 ; 979.86,1048 979.86,1092
  BOTTOM w13.78: v1(787.1,989.7) 787.1,970.64 802.14,955.6 810.72,955.6 ; 822,895.6 822,899 v1(849.9,926.9) 849.9,948.7 843,955.6 ; 848.72,648.6 849.9,649.78 v1(849.9,675.7) ; 881,648.6 885.6,648.6 v1(912.7,675.7) ; v1(881.3,707.1) 912,737.8 912,739.6 ; v1(881.3,832.7) 881.3,835.62 904.68,859 ; 882.73,935.73 882.73,925.47 v1(912.7,895.5) 941.5,895.5 942.73,896.73 ; 912,771.88 958,771.88 ; 915.01,935.73 935.27,935.73 v1(944.1,926.9) ; 941,585.32 981,585.32 1010,585.32 1039,614.32 1036.88,614.32 ; v1(944.1,707.1) 957,720 957,738.6 ; 957,770.88 958,771.88 ; 975.01,896.73 975.5,896.24 v1(975.5,864.1) ; 975.01,939.59 987.7,926.9 v1(1006.9,926.9) ; v1(975.5,801.3) 975.5,771.88 ; 976,662.32 994.02,644.3 v1(1006.9,644.3) ; 1000,770.88 1000,771.88 ; v1(1006.9,801.3) 1000,794.4 1000,771.88 ; 1012.14,1048 1029.94,1065.8 1032.08,1065.8 1060.01,1093.73 ; 1020.01,1099.87 1012.14,1092 1047.87,1127.73 1084,1127.73 v1(1100,1143.73) ; 1029,830.6 1029,824.74 1052.44,801.3 v1(1069.7,801.3) ; 1038,957.46 1038,927.2 v1(1038.3,926.9) ; 1038,989.74 1038,1020.8 v1(1038.3,1021.1) ; v1(1038.3,675.7) 1039,675 1039,646.6 ; v1(1069.7,644.3) 1098.16,644.3 1099.01,643.45 ; v1(1069.7,675.7) 1098.98,675.7 ; v1(1069.7,769.9) 1067.72,771.88 1044,771.88 1000,771.88 ; v1(1069.7,832.7) 1069.7,860.44 1072.86,863.6 ; v1(1069.7,926.9) 1100.7,926.9 1101,926.6 ; 1105.14,863.6 1132,863.6 ; 1129,1048.14 1133.36,1052.5 v1(1163.9,1052.5) ; v1(1132.5,769.9) 1133.28,769.12 1133.28,742.6 ; v1(1132.5,958.3) 1133.28,957.52 1133.28,926.6 ; v1@1133.28,831.92 v1(1132.5,832.7) 1132.5,863.1 1132,863.6 ; 1164,1083.46 1164.44,1083.9 v1(1195.3,1083.9) 1223.02,1083.9 1229.72,1090.6 1229.72,1044.88 1230,1044.6 ; v1(1195.3,1021.1) 1204.14,1012.26 1204.14,990.73 ; 1252,841.14 1252,853.74 1228.37,877.37 1196,877.37 1182.73,864.1 1132.5,864.1 1132,863.6 ; 1481.84,795.23 1481.84,784.95 v1@1517.82,748.97 ; v1(1512,892) 1557.27,846.73 1615.01,846.73 ; v1@1517.82,748.79 v1(1518.01,748.79) 1536.18,748.79 1585.24,699.73 ; 1617.52,699.73 1639.45,699.73 v1(1664.76,725.03) ; v1(1761,1145) 1794.01,1145 ; 1777.28,1109 1818.01,1109 v1@1834.01,1125 ; v1(1885.23,473.06) 1916.57,441.73 1932.48,441.73 ; v1(1885.23,567.56) 1898.4,580.73 1932.48,580.73 ; v1(1885.23,693.54) 1931.29,693.54 1932.48,694.73 ; v1(1885.23,756.53) 1886.04,755.73 1932.48,755.73 ; v1(1923.01,1156.73) 1956.73,1156.73 1956.73,1198.73 v1(1923.01,1198.73) ; 1925.01,837.73 v1(1964.76,797.98) 1964.76,755.73 1964.76,694.73 1993.01,694.73 1994.01,693.73 ; 1931.01,373.73 1974.01,373.73 1992.01,391.73 v1(1992.01,441.73) 1964.76,441.73 ; 1964.76,580.73 v1(1994.01,580.73) ; 958,771.88 975.5,771.88 ; 975.5,771.88 1000,771.88
  other v1: 104.68,36.73 178.09,36.73 251.51,36.73 324.93,36.73 398.35,36.73 471.76,36.73 545.18,36.73 618.6,36.73 692.01,36.73 765.43,36.73 838.85,36.73 912.27,36.73 985.68,36.73 1059.1,36.73 1132.52,36.73 1205.94,36.73 1279.35,36.73 1352.77,36.73 1426.19,36.73 1499.61,36.73 1573.02,36.73 1646.44,36.73 1719.86,36.73 1793.28,36.73 1866.69,36.73 1940.11,36.73 2013.53,36.73 2086.95,36.73 40.01,63.73 2125.34,63.73 40.01,136.73 2125.34,136.73 40.01,209.73 2125.34,209.73 294.01,269.73 40.01,282.73 2125.34,282.73 1349.01,288.73 1458.84,288.73 1568.68,288.73 1678.51,288.73 1788.34,288.73 1898.18,288.73 2008.01,288.73 839.01,353.73 40.01,355.73 2125.34,355.73 2032.01,360.73 2032.01,423.73 40.01,428.73 2125.34,428.73 921.01,445 2032.01,486.73 40.01,501.73 2125.34,501.73 100.01,534.73 2032.01,549.73 40.01,574.73 2125.34,574.73 2032.01,612.73 286.01,620.73 1999.01,639.73 1951.01,640.73 40.01,647.73 2125.34,647.73 98.01,658.73 286.01,677.73 40.01,720.73 2125.34,720.73 40.01,793.73 2125.34,793.73 1790.01,836.73 1841.51,836.73 1893.01,836.73 1740.01,837.73 40.01,866.73 2125.34,866.73 1772,871.73 1553.01,891.73 1856,939 40.01,939.73 2129.34,939.73 1623,954 1857,965 818.5,989.7 1856,991 1623,1011 1651.5,1011.73 40.01,1012.73 2129.34,1012.73 40.01,1085.73 2125.34,1085.73 1620,1094.73 1648,1094.73 1684,1095.73 1833.01,1125 1461,1128 1648,1129.73 1684,1129.73 1620,1130.73 2034.01,1145 40.01,1158.73 2125.34,1158.73 2033.01,1169 1956.73,1178.73 307.01,1180.73 789.01,1182.73 2032,1195.73 1137.01,1213 2032,1220.73 40.01,1231.73 2128.34,1231.73 2053.01,1269 222.01,1287.73 1224.01,1298.73 1055.01,1302.73 40.01,1304.73 2128.34,1304.73 1973.01,1323.73 2035.01,1324.73 1541.01,1357.2 40.01,1377.73 2125.34,1377.73 40.01,1450.73 2125.34,1450.73 40.01,1523.73 2125.34,1523.73 104.01,1536.73 177.43,1536.73 250.84,1536.73 324.26,1536.73 397.68,1536.73 471.1,1536.73 544.51,1536.73 617.93,1536.73 691.35,1536.73 764.77,1536.73 838.18,1536.73 911.6,1536.73 985.02,1536.73 1058.44,1536.73 1131.85,1536.73 1205.27,1536.73 1278.69,1536.73 1352.11,1536.73 1425.52,1536.73 1498.94,1536.73 1572.36,1536.73 1645.78,1536.73 1719.19,1536.73 1792.61,1536.73 1866.03,1536.73 1939.44,1536.73 2012.86,1536.73 2086.28,1536.73

## Polygon pours and split planes (outlines as drawn)
no net on TOP "TOP-No Net" (hatched 90Degree grid 4 track 5, remove dead copper, pour order 1000): 0,1574.8 2165.35,1574.8 2165.35,1204.73 2165.35,0 1443.01,0 0,0 0,1574.8
no net on TOP "TOP-No Net" (hatched 90Degree grid 4 track 5, remove dead copper, pour order 1000): 1623.01,1204.73 1700.01,1204.73 1700.01,1146.73 1700.01,1086.73 1628.01,1086.73 1609.01,1086.73 1609.01,1134.73 1609.01,1204.73 1623.01,1204.73
no net on TOP "TOP-No Net" (hatched 90Degree grid 4 track 5, remove dead copper, pour order 1003): 1792,939 1792,1006 1855,1006 1876,1006 1876,951 1876,929 1811,929 1792,929 1792,939
no net on TOP "TOP-No Net" (hatched 90Degree grid 4 track 5, remove dead copper, pour order 1004): 1741,977 1741,1020 1634,1020 1614,1020 1614,936 1614,932 1734,932 1741,932 1741,977
no net on BOTTOM "TOP-No Net" (hatched 90Degree grid 4 track 5, remove dead copper, pour order 1001): 0,1574.8 2165.35,1574.8 2165.35,1204.73 2165.35,0 1443.01,0 0,0 0,1574.8
no net on BOTTOM "TOP-No Net" (hatched 90Degree grid 4 track 5, remove dead copper, pour order 1003): 1656.01,873.73 1591.01,873.73 1591.01,885.73 1591.01,1029.43 1685,1029.43 1754.01,1029.43 1754.01,973 1754.01,966.73 1677.01,966.73 1656.01,966.73 1656.01,873.73
no net on BOTTOM "TOP-No Net" (hatched 90Degree grid 4 track 5, remove dead copper, pour order 1002): 1964.01,1287.73 1964.01,1150.73 1844.01,1150.73 1844.01,1287.73
no net on BOTTOM "TOP-No Net" (hatched 90Degree grid 4 track 5, remove dead copper, pour order 1001): 2063.01,1298.17 2063.01,1137.73 1982.01,1137.73 1982.01,1298.17
no net on BOTTOM "TOP-No Net" (hatched 90Degree grid 4 track 5, remove dead copper, pour order 1007): 1668,926 1668,866 1700,866 1827,866 1827,882 1827,923 1807,923 1807,926 1668,926
no net on BOTTOM "TOP-No Net" (hatched 90Degree grid 4 track 5, remove dead copper, pour order 1008): 1668,984 1668,1062 1745,1062 1765,1062 1765,969 1765,935 1745,935 1730,935 1730,971 1730,984 1668,984
no net on BOTTOM "TOP-No Net" (hatched 90Degree grid 4 track 5, remove dead copper, pour order 1009): 1800,1000 1874,1000 1874,957 1800,957
no net on BOTTOM "TOP-No Net" (hatched 90Degree grid 4 track 5, remove dead copper, pour order 1004): 1093.01,837.73 1213.01,837.73 1213.01,818 1265.01,818 1265.01,746.73 1093.01,746.73
no net on ART04 "TOP-No Net" (hatched 90Degree grid 4 track 5, remove dead copper, pour order 1002): 0,1574.8 2165.35,1574.8 2165.35,1204.73 2165.35,0 1443.01,0 0,0 0,1574.8
no net on ART04 "TOP-No Net" (hatched 90Degree grid 4 track 5, remove dead copper, pour order 1005): 1932.01,924.73 1932.01,1443.73 1869.01,1443.73 1869.01,1059.73 1835.01,1059.73 1835.01,924.73
no net on ART04 "TOP-No Net" (hatched 90Degree grid 4 track 5, remove dead copper, pour order 1007): 1029.01,899.73 1029.01,938.4 1142.34,1051.73 1744.01,1051.73 1744.01,1308.73 1797.01,1308.73 1797.01,1431.73 1850.01,1431.73 1850.01,1081.73 1817.01,1081.73 1817.01,899.73
no net on ART04 "TOP-No Net" (hatched 90Degree grid 4 track 5, remove dead copper, pour order 1006): 1700.01,1087.73 1700.01,1348.73 1654.01,1348.73 1654.01,1433.73 1585.01,1433.73 1563.01,1433.73 1563.01,1390.73 1563.01,1071.73 1636.01,1071.73 1700.01,1071.73 1700.01,1087.73
no net on ART03 "TOP-No Net" (hatched 90Degree grid 4 track 5, remove dead copper, pour order 1003): 0,1574.8 2165.35,1574.8 2165.35,1204.73 2165.35,0 1443.01,0 0,0 0,1574.8
no net on ART03 "TOP-No Net" (hatched 90Degree grid 4 track 5, remove dead copper, pour order 1009): 1186.01,872.73 1278.01,964.73 1278.01,1152.73 1701.01,1152.73 1701.01,1053.73 1424,1053.73 1424,883.72 1318.01,777.73 1142.01,777.73 1142.01,695.73 840.01,695.73 840.01,872.73
no net on ART03 "TOP-No Net" (hatched 90Degree grid 4 track 5, remove dead copper, pour order 1008): 1006.9,889.23 1169.62,889.23 1256.01,975.62 1256.01,1168.73 1815.01,1168.73 1815.01,1445 1670.01,1445 1670.01,1328.73 1006.9,1328.73
no net on GND02 (split plane): 2145.26,20.1 20.1,20.1 20.1,1554.71 2145.26,1554.71
no net on PWR05 (split plane): 2105.26,1462.83 1949.01,1462.83 1947.06,1462.44 1945.41,1461.33 1944.3,1459.68 1943.91,1457.73 1943.91,1305.73 1943.91,930.84 1867.9,854.83 1024.01,854.83 1022.06,854.44 1020.41,853.33 977.41,810.33 976.3,808.68 975.91,806.73 975.91,412.73 976.3,410.78 977.41,409.13 1091.41,295.13 1093.06,294.02 1095.01,293.63 2105.26,293.63 2105.26,60.09 60.09,60.09 60.09,1514.71 2105.26,1514.71
no net on PWR05 (split plane): 2105.26,303.83 1097.12,303.83 986.11,414.84 986.11,804.62 1026.12,844.63 1870.01,844.63 1871.96,845.02 1873.61,846.13 1952.61,925.13 1953.72,926.78 1954.11,928.73 1954.11,1305.73 1954.11,1452.63 2105.26,1452.63

## Keep-outs
Keep-Out Layer:
  the board outline again, w5

## Other copper
TOP:
  rectangle: 1664,945 1734,998
  pour cut-out: 1273.01,583.73 1322.26,583.73 1322.26,541.01 1273.01,541.01
  pour cut-out: 1737.01,1090.73 1808.96,1090.73 1808.96,1024.73 1783.01,1024.73 1783.01,884.73 1737.01,884.73
  pour cut-out: 1400.78,1066.73 1437.01,1066.73 1437.01,1030.73 1400.78,1030.73
  pour cut-out: 1496.01,1045.73 1560.01,1045.73 1560.01,1016.73 1496.01,1016.73
  pour cut-out: 1543.01,1253.73 1543.01,1212.73 1442.01,1212.73 1442.01,1253.73
  text "TOP" at 28,1718 h60
ART03:
  rectangle: 1710.01,1369 1788.01,1445
  pour cut-out: 149.01,180.73 1632,180.73 1632,78.73 149.01,78.73
  pour cut-out: 613.01,705.73 613.01,440.73 899.01,440.73 899.01,203.73 168.98,203.73 168.98,705.73
  pour cut-out: 1594.01,515.73 1686.01,515.73 1686.01,390.73 1594.01,390.73
  pour cut-out: 1053.01,665.73 1123.01,665.73 1123.01,581.5 1053.01,581.5
  pour cut-out: 1414.01,773.73 1774.86,773.73 1774.86,619.73 1414.01,619.73
  text "ART03" at 587,1718 h60
ART04:
  rectangle: 1569.01,1357.73 1632,1422.73
  rectangle: 1810.01,1366.73 1850.01,1430.73
  rectangle: 1869.01,1368.73 1948,1433
  pour cut-out: 1059.01,896.73 1087.01,896.73 1087.01,877 1059.01,877
  pour cut-out: 101.01,1513.73 1458.41,1513.73 1458.41,1416.73 1343.01,1416.73 1343.01,1138.73 1280.01,1075.73 1093.01,1075.73 1093.01,1173.73 1267.01,1173.73 1267.01,1390.73 97.01,1390.73 97.01,1517.73
  pour cut-out: 184.01,1399.73 452.01,1399.73 452.01,953.1 184.01,953.1
  pour cut-out: 217.01,693 470.01,693 470.01,582.73 217.01,582.73
  pour cut-out: 404.01,485.73 585.01,485.73 585.01,418.73 416.01,418.73 416.01,486.73
  text "ART04" at 937,1719 h60
BOTTOM:
  rectangle: 1161.81,758.73 1204,827.73
  rectangle: 1646.68,964.82 1739.01,997
  rectangle: 1811,965 1858,991
  rectangle: 1745,873 1814,908
  rectangle: 1842.5,932 1875,976
  rectangle: 1196,784.32 1255,816
  pour cut-out: 1292.01,1041.73 1356.01,1041.73 1356.01,1004 1292.01,1004
  pour cut-out: 1766.01,1091.73 1799.01,1091.73 1799.01,1043.73 1766.01,1043.73
  text "BOTTOM" at 2056,1718 h60
GND02 (plane layer: these items are gaps in the copper):
  text "GND02" at 242,1719 h60
PWR05 (plane layer: these items are gaps in the copper):
  lines w10: 2165.35,1457.73 1949.01,1457.73 1949.01,1305.73 1949.01,928.73 1870.01,849.73 1055.01,849.73 1024.01,849.73 981.01,806.73 981.01,412.73 1095.01,298.73 2176.01,298.73
  text "PWR05" at 1311,1716 h60

## Silkscreen, mask and mechanical layers (free items; w line width, h text height)
Top Overlay:
  lines w5: 569.01,1157.73 569.01,1323.73 597.01,1323.73 790.01,1323.73 790.01,1157.73 569.01,1157.73 ; 1050.01,1128.73 1050.01,1361.73 1066.01,1361.73 1388.01,1361.73 1388.01,1128.73 1050.01,1128.73
  text "A" at 1078.01,1329.73 h25
  text "A" at 734.01,1287.73 h25
Bottom Overlay:
  lines w5: 868.01,859.73 879.01,859.73 ; 893.01,795.91 1166.01,795.91 1166.01,295.73 900.69,295.73 900.69,695.73 875.01,695.73 875.01,795.91 963.01,795.91 ; 942.01,1011.73 975.01,1011.73 975.01,999.73 ; 955.69,817.73 968.01,817.73 ; 1024.01,888.73 1024.01,898.73 ; 1127.01,1078.73 1127.01,1099.73
Drill Drawing:
  text ".Legend" at 2356,-6 h30

## Text inside footprints (layer, text, board x,y; h text height)
IC3: Top Overlay "1" at 665.51,531.3 h25 r90; Top Overlay "A" at 710.51,466.3 h25 r90
IC6: Top Overlay "1" at 1645,814.06 h25; Top Overlay "A" at 1611.01,734.73 h25 r90